# EAGLE board 8x8matrix_tlc2 (EAGLE 6.5.0)
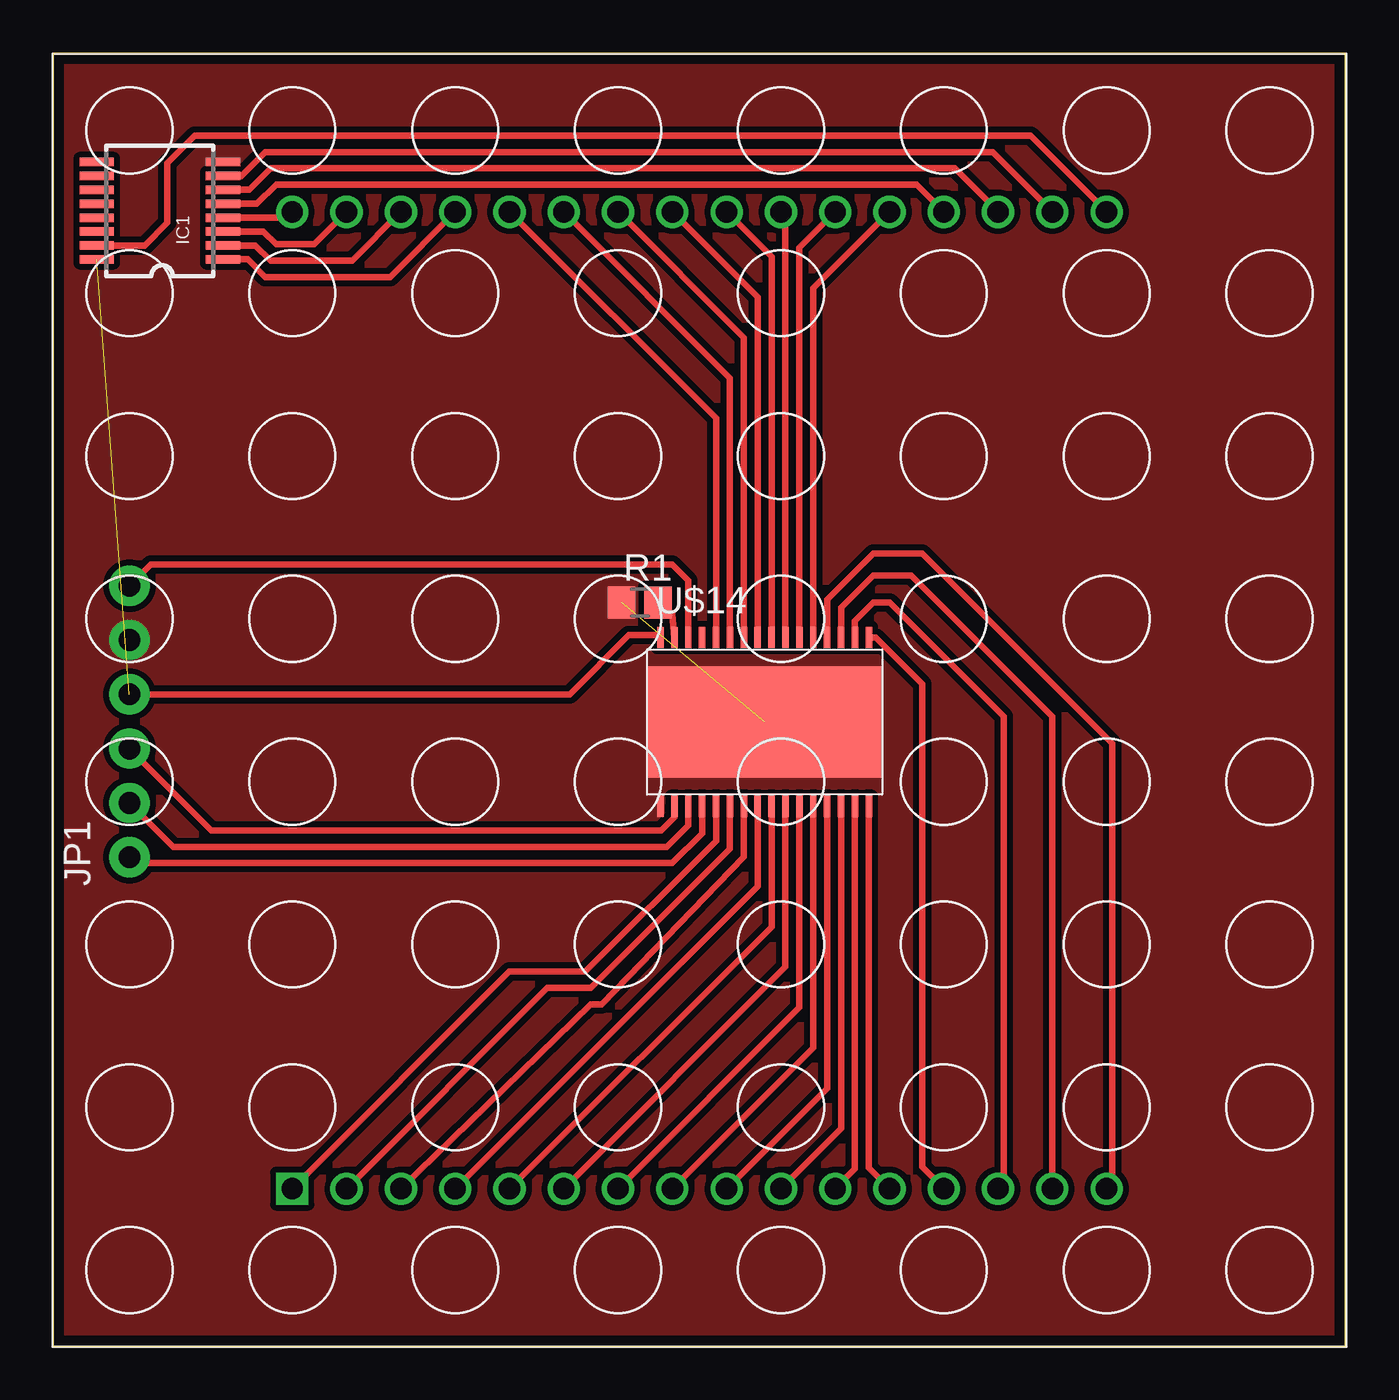
[diagram p0: board, top side]

Size 60.43 x 60.5 mm. Coordinates in mm from the lower left corner, seen from the top.
Outline: 0,0 60.43,0 60.43,60.5 0,60.5 0,0
Copper layers (1*16): Top 0.035mm / dielectric 1.5mm / Bottom 0.035mm
Design rules "default *": minimum track width 10mil, minimum drill 24mil, track to track 8mil, track to pad 8mil, pad to pad 8mil, via to via 8mil, smd to smd 8mil, copper to edge 20mil, drill to drill 8mil, minimum pad ring 10mil, minimum via ring 8mil, stop-mask expansion 4mil, vias tented up to drill 0mil, thermal gap 10mil

## Footprints (pad centres in the part's own frame; a part is rotated, then mirrored left to right if it is on the bottom)
TSSOP16 = smd 0.4 x 1.6: 1 -2.225,-2.85; 2 -1.575,-2.85; 3 -0.925,-2.85; 4 -0.275,-2.85; 5 0.375,-2.85; 6 1.025,-2.85; 7 1.675,-2.85; 8 2.325,-2.85; 9 2.325,3.05; 10 1.675,3.05; 11 1.025,3.05; 12 0.375,3.05; 13 -0.275,3.05; 14 -0.925,3.05; 15 -1.575,3.05; 16 -2.225,3.05
1X06 = drill 1.016 pad 1.88: 1 0,0; 2 2.54,0; 3 5.08,0; 4 7.62,0; 5 10.16,0; 6 12.7,0
R0805 = smd 1.3 x 1.5: 1 -0.85,0; 2 0.85,0
8X8MATRIX = drill 1 square: P1 -19.05,-22.86 | drill 1: P2 -16.51,-22.86; P3 -13.97,-22.86; P4 -11.43,-22.86; P5 -8.89,-22.86; P6 -6.35,-22.86; P7 -3.81,-22.86; P8 -1.27,-22.86; P9 1.27,-22.86; P10 3.81,-22.86; P11 6.35,-22.86; P12 8.89,-22.86; P13 11.43,-22.86; P14 13.97,-22.86; P15 16.51,-22.86; P16 19.05,-22.86; P17 19.05,22.86; P18 16.51,22.86; P19 13.97,22.86; P20 11.43,22.86; P21 8.89,22.86; P22 6.35,22.86; P23 3.81,22.86; P24 1.27,22.86; P25 -1.27,22.86; P26 -3.81,22.86; P27 -6.35,22.86; P28 -8.89,22.86; P29 -11.43,22.86; P30 -13.97,22.86; P31 -16.51,22.86; P32 -19.05,22.86
HTSSOP32DAP = smd 0.3 x 1: 1 -4.875,-3.95; 2 -4.225,-3.95; 3 -3.575,-3.95; 4 -2.925,-3.95; 5 -2.275,-3.95; 6 -1.625,-3.95; 7 -0.975,-3.95; 8 -0.325,-3.95; 9 0.325,-3.95; 10 0.975,-3.95; 11 1.625,-3.95; 12 2.275,-3.95; 13 2.925,-3.95; 14 3.575,-3.95; 15 4.225,-3.95; 16 4.875,-3.95; 17 4.875,3.95; 18 4.225,3.95; 19 3.575,3.95; 20 2.925,3.95; 21 2.275,3.95; 22 1.625,3.95; 23 0.975,3.95; 24 0.325,3.95; 25 -0.325,3.95; 26 -0.975,3.95; 27 -1.625,3.95; 28 -2.275,3.95; 29 -2.925,3.95; 30 -3.575,3.95; 31 -4.225,3.95; 32 -4.875,3.95 | smd 11 x 5.2: EXP 0,0

## Placement (x,y rotation side)
IC1  74595  [TSSOP16]  5.08,53.09 90 top
JP1  [1X06]  3.56,22.88 90 top
R1  [R0805]  27.43,34.8 0 top
U$1  [8X8MATRIX]  30.23,30.23 0 top
U$14  TLC5947DAP  [HTSSOP32DAP]  33.27,29.21 0 top

## Library data of the parts
IC1 = SparkFun-DigitalIC
JP1 = SparkFun-Connectors
R1 = resistor
U$1 = mylib
U$14 = TLC5947

## Nets
5.0V: IC1.16 JP1.4 U$14.32
BLANK: JP1.3 U$14.2
GND: IC1.8 JP1.5 R1.1 U$14.1 U$14.EXP
N$1: U$1.P1 U$14.5
N$2: U$1.P2 U$14.6
N$3: U$1.P3 U$14.7
N$4: U$1.P4 U$14.8
N$5: U$1.P5 U$14.9
N$6: U$1.P6 U$14.10
N$7: U$1.P7 U$14.11
N$8: U$1.P8 U$14.12
N$9: U$1.P9 U$14.13
N$10: U$1.P10 U$14.14
N$11: U$1.P11 U$14.15
N$12: U$1.P12 U$14.16
N$13: U$1.P13 U$14.17
N$14: U$1.P14 U$14.18
N$15: U$1.P15 U$14.19
N$16: U$1.P16 U$14.20
N$17: U$1.P21 U$14.21
N$18: U$1.P22 U$14.22
N$19: U$1.P23 U$14.23
N$20: U$1.P24 U$14.24
N$21: U$1.P25 U$14.25
N$22: U$1.P26 U$14.26
N$23: U$1.P27 U$14.27
N$24: U$1.P28 U$14.28
N$25: IC1.1 U$1.P29
N$26: IC1.2 U$1.P30
N$27: R1.2 U$14.31
N$28: JP1.2 U$14.3
N$29: IC1.3 U$1.P31
N$30: IC1.4 U$1.P32
N$31: IC1.5 U$1.P20
N$32: IC1.6 U$1.P19
N$33: IC1.7 U$1.P18
N$34: IC1.15 U$1.P17
SIN: JP1.1 U$14.4
XLAT: JP1.6 U$14.30

## Tracks (layer width: path | path; a pad name or v marks a point on that pad's centre or on a via)
5.0V  (1 unrouted)
  Top 0.305: JP1.4 24.15,30.5 26.92,33.27 28.29,33.27 U$14.32
BLANK
  Top 0.305: U$14.2 29.05,24.73 28.45,24.13 7.39,24.13 JP1.3
GND  (1 unrouted)
  pour Top (isolate 0.279, no thermals): 0,60.5 0,0 60.45,0 60.45,60.5
N$1
  Top 0.305: U$14.5 31,23.63 24.89,17.53 21.34,17.53 U$1.P1
N$2
  Top 0.305: U$14.6 31.65,23.27 25.15,16.76 23.11,16.76 U$1.P2
N$3
  Top 0.305: U$14.7 32.3,22.9 25.65,16 25.15,16 U$1.P3
N$4
  Top 0.305: U$14.8 32.95,21.52 U$1.P4
N$5
  Top 0.305: U$14.9 33.6,19.63 U$1.P5
N$6
  Top 0.305: U$14.10 34.25,17.74 U$1.P6
N$7
  Top 0.305: U$14.11 34.9,15.85 U$1.P7
N$8
  Top 0.305: U$14.12 35.55,13.96 U$1.P8
N$9
  Top 0.305: U$14.13 36.2,12.07 U$1.P9
N$10
  Top 0.305: U$14.14 36.85,10.18 U$1.P10
N$11
  Top 0.305: U$14.15 37.5,8.29 U$1.P11
N$12
  Top 0.305: U$14.16 38.15,8.33 U$1.P12
N$13
  Top 0.305: U$14.17 38.47,33.16 40.64,30.99 40.64,8.38 U$1.P13
N$14
  Top 0.305: U$14.18 37.5,33.94 38.35,34.8 39.12,34.8 44.45,29.46 44.45,7.62 U$1.P14
N$15
  Top 0.305: U$14.19 36.85,34.56 38.35,36.07 40.13,36.07 46.74,29.46 U$1.P15
N$16
  Top 0.305: U$14.20 36.2,34.93 38.35,37.08 40.64,37.08 49.53,28.19 49.53,7.62 U$1.P16
N$17
  Top 0.305: U$14.21 35.55,49.52 U$1.P21
N$18
  Top 0.305: U$14.22 34.9,51.41 U$1.P22
N$19
  Top 0.305: U$14.23 34.25,52.87 U$1.P23
N$20
  Top 0.305: U$14.24 33.6,50.98 U$1.P24
N$21
  Top 0.305: U$14.25 32.95,49.09 U$1.P25
N$22
  Top 0.305: U$14.26 32.3,47.2 U$1.P26
N$23
  Top 0.305: U$14.27 31.65,45.31 U$1.P27
N$24
  Top 0.305: U$14.28 31,43.42 U$1.P28
N$25
  Top 0.305: IC1.1 9.08,50.86 9.91,50.04 15.75,50.04 U$1.P29
N$26
  Top 0.305: IC1.2 9.45,51.51 10.16,50.8 13.97,50.8 U$1.P30
N$27
  Top 0.305: R1.2 28.45,34.8 28.96,34.27 U$14.31
N$28
  Top 0.305: U$14.3 29.7,24.36 28.7,23.37 5.61,23.37 JP1.2
N$29
  Top 0.305: IC1.3 9.81,52.16 10.41,51.56 12.19,51.56 U$1.P31
N$30
  Top 0.305: IC1.4 10.9,52.81 U$1.P32
N$31
  Top 0.305: IC1.5 9.52,53.46 10.41,54.36 40.39,54.36 U$1.P20
N$32
  Top 0.305: IC1.6 9.15,54.11 10.16,55.12 42.16,55.12 U$1.P19
N$33
  Top 0.305: IC1.7 8.79,54.76 9.91,55.88 43.94,55.88 U$1.P18
N$34
  Top 0.305: IC1.15 4.27,51.51 5.33,52.58 5.33,55.37 6.6,56.64 45.72,56.64 U$1.P17
SIN
  Top 0.305: U$14.4 30.35,24 28.96,22.61 3.83,22.61 JP1.1
XLAT
  Top 0.305: U$14.30 29.7,35.83 28.96,36.58 4.55,36.58 JP1.6